# Altium PCB nrf52840_bma250e.PcbDoc
Units mil, origin at the board's own origin, x right, y up, seen from the top; angles counter-clockwise.
Board outline 748.03 x 984.25 mil, 2 copper layers (Top Layer, Bottom Layer), stack 12.8 mil thick; 26 components, 60 nets, 136 pads, 54 vias.
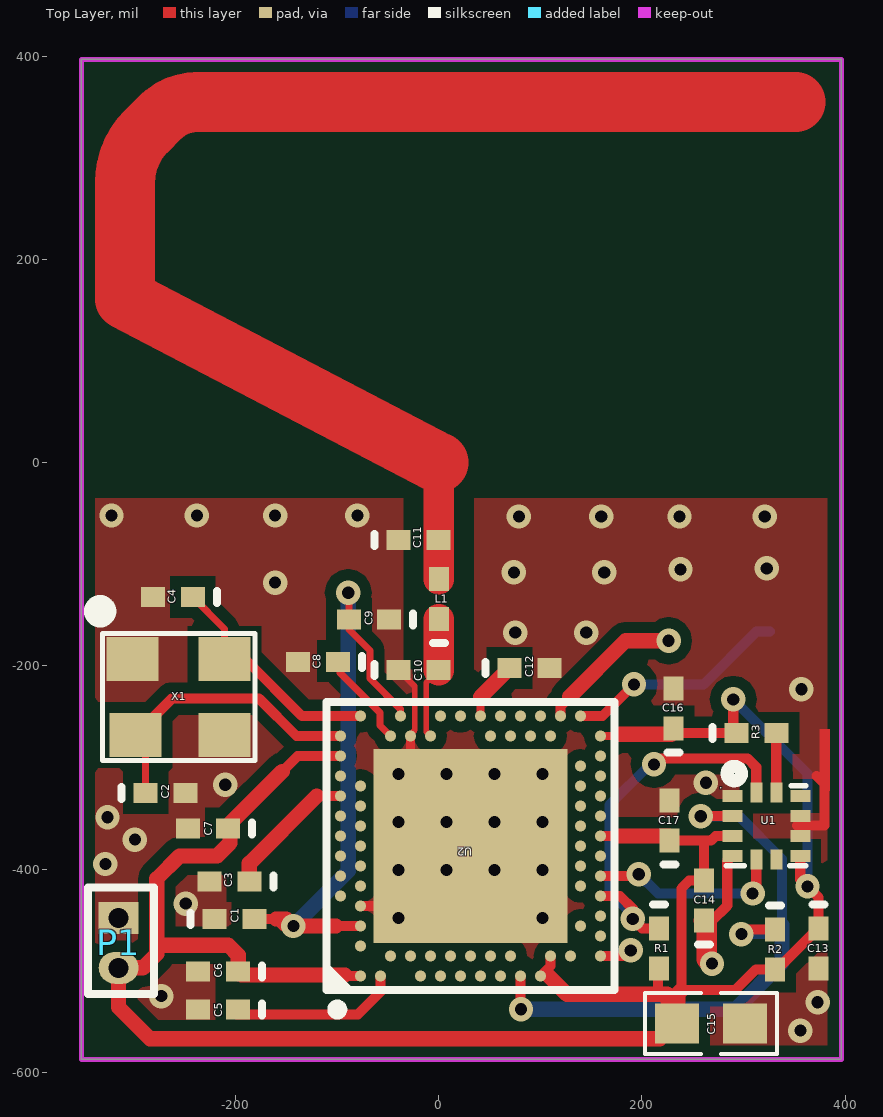
[diagram p0: Top Layer view]
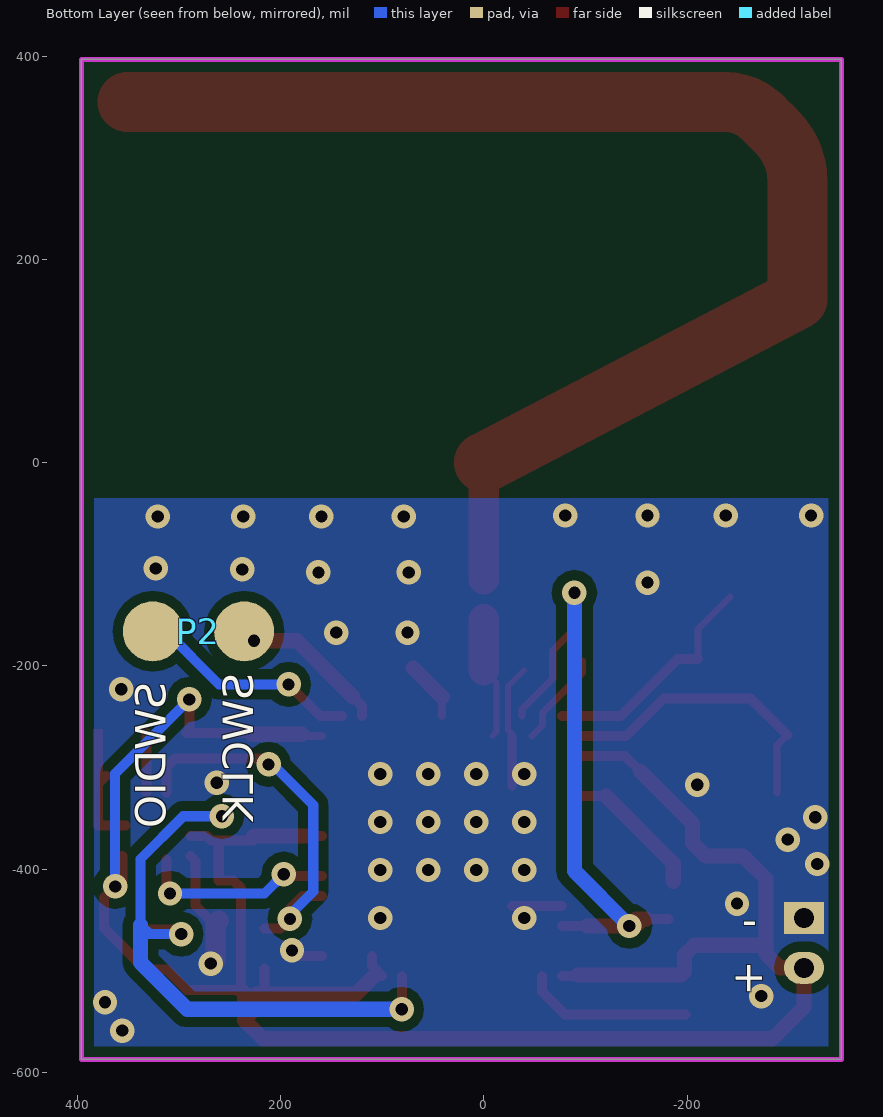
[diagram p1: Bottom Layer view, seen from below]

## Layer stack, top to bottom
Top Solder: solder mask 0.4, Solder Resist, Dk 3.5
Top Layer: signal copper 1.4
Dielectric 1: core 10, FR-4, Dk 4.2
Bottom Layer: signal copper 1.4
Bottom Solder: solder mask 0.4, Solder Resist, Dk 3.5

## Board outline
-351.72,-587.24 -351.72,397.02 396.31,397.02 396.31,-587.24

## Design rules (kind name [scope] priority, off if disabled: settings)
Clearance [All] p1: gap=5
ComponentClearance [All] p1 off: gap=10 collisioncheckmode=3 verticalgap=10 showdistances=FALSE
Height [All] p1 off: minheight=0 maxheight=1000 prefheight=500
MinimumSolderMaskSliver [All] p1 off: minsoldermaskwidth=10
NetAntennae [All] p1 off: netantennaetolerance=0
PlaneConnect [All] p1: planeconnectstyle=Direct reliefexpansion=20 reliefentries=4 reliefconductorwidth=10 reliefairgap=10
PolygonConnect [All] p1: connectstyle=Direct reliefconductorwidth=10 reliefentries=4 polygonreliefangle="90 Angle" airgapwidth=10
RoutingVias [All] p1: holewidth=28 width=50 viastyle="Through Hole" minholewidth=28 minwidth=50 maxholewidth=28 maxwidth=50
SilkToSilkClearance [All] p1 off: silktosilkclearance=10
SilkToSolderMaskClearance [IsPad] p1 off: minsilkscreentomaskgap=10 clearancetoexposedcopper=TRUE
SolderMaskExpansion [All] p1: expansion=4
Width [All] p1: maxlimit=100 minlimit=1 preferedwidth=10 minimp=50.000000 maximp=50.000000 favimp=50.000000
23 further rules are at their usual default settings.

## Components (designator, comment, footprint, x,y, rotation, side; value= is the part's Value field where it differs from the comment)
C1 "1.0µF" 0402-A -201,-449 r0 top
C2 "12pF" 0402-A -268.69,-325.24 r0 top
C3 "N.C." 0402-A -206,-412 r180 top
C4 "12pF" 0402-A -261.69,-132.24 r180 top
C5 "100nF" 0402-A -217,-538 r180 top
C6 "1.0µF" 0402-A -217,-501 r180 top
C7 "100nF" 0402-A -227,-360 r180 top
C8 "100pF" 0402-A -119,-196 r180 top
C9 "N.C." 0402-A -68.69,-154.24 r180 top
C10 "0.8pF" 0402-A -19.69,-204.24 r0 top
C11 "0.5pF" 0402-A -19.69,-76.24 r0 top
C12 "820pF" 0402-A 89.31,-202.24 r0 top
C13 "0.1uF" 0402-A 374,-478 r270 top
C14 "1uF" 0402-A 261,-431 r90 top
C15 "4.7µF" 0603-1 268,-552 r0 top
C16 "100nF" 0402-a 231,-242 r90 top
C17 "100nF" 0402-a 227,-352 r90 top
L1 "4.7nH" 0402-A 0.31,-134.24 r90 top
P1 "Header 2" HDR1_2_1.25 -315,-448 r270 top
P2 "Header 4" HDR1X4 -1280,-854 r0 top
R1 "10K" 0402-A 217,-478 r270 top
R2 "10K" 0402-A 331,-479 r270 top
R3 "10K" 0402-A 313,-266 r0 top
U1 "bma250e" bma250e 289,-328 r0 top
U2 "nRF52840-QIAA" AQFN50P700X700X85_HS-74N 31.31,-377.24 r90 top
X1 "32MHz" SMD3225 -210.69,-193.24 r180 top

## Footprints (in the part's own frame and the unit in brackets; to place one, negate y for a bottom-side part, rotate by r counter-clockwise, add the part's x,y. Pads: shape width x height; smd on the part's side, far side on the other; paste and mask are expansions set on the pad)
0402-A [mm] "Chip Inductor; Body 1 x 0.5 mm (LxW typ)"
  rect 0.6x0.5 smd: 1(-0.5,0) 2(0.5,0)
  silkscreen extent -1.1,-0.15 -1.1,0.15
0402-a [mm] "Chip Inductor; Body 1 x 0.5 mm (LxW typ)"
  rect 0.6x0.5 smd: 1(-0.5,0) 2(0.5,0)
  silkscreen extent -1.1,-0.15 -1.1,0.15
0603-1 [mm] "贴片带丝印"
  rect 1.1x1 smd: 1(-0.85,0) 2(0.85,0)
  silkscreen extent -1.65,-0.76 1.65,0.76, body extent -1.14,-0.38 1.14,0.38, height 1
AQFN50P700X700X85_HS-74N [mm]
  rect 4.85x4.85 smd mask+0.05: 74(0,0)
  round 0.275 smd paste+0.012 mask+0.05: A8(-1.25,3.25) A10(-0.75,3.25) A12(-0.25,3.25) A14(0.25,3.25) A16(0.75,3.25) A18(1.25,3.25) A20(1.75,3.25) A22(2.25,3.25) A23(2.75,3.25) AA24(3.25,-2.25) AB2(-2.75,-2.5) AC5(-2,-2.75) AC9(-1,-2.75) AC11(-0.5,-2.75) AC13(0,-2.75) AC15(0.5,-2.75) AC17(1,-2.75) AC19(1.5,-2.75) AC21(2,-2.75) AC24(3.25,-2.75) AD2(-2.75,-3.25) AD4(-2.25,-3.25) AD6(-1.75,-3.25) AD8(-1.25,-3.25) AD10(-0.75,-3.25) AD12(-0.25,-3.25) AD14(0.25,-3.25) AD16(0.75,-3.25) AD18(1.25,-3.25) AD20(1.75,-3.25) AD22(2.25,-3.25) AD23(2.75,-3.25) B1(-3.25,2.75) B3(-2.5,2.75) B5(-2,2.75) B7(-1.5,2.75) B9(-1,2.75) B11(-0.5,2.75) B13(0,2.75) B15(0.5,2.75) B17(1,2.75) B19(1.5,2.75) B24(3.25,2.75) C1(-3.25,2.25) D2(-2.75,2) D23(2.75,2) E24(3.25,1.75) F2(-2.75,1.5) F23(2.75,1.5) G1(-3.25,1.25) H2(-2.75,1) H23(2.75,1) J1(-3.25,0.75) J24(3.25,0.75) K2(-2.75,0.5) L1(-3.25,0.25) L24(3.25,0.25) M2(-2.75,0) N1(-3.25,-0.25) N24(3.25,-0.25) P2(-2.75,-0.5) P23(2.75,-0.5) R1(-3.25,-0.75) R24(3.25,-0.75) T2(-2.75,-1) T23(2.75,-1) U1(-3.25,-1.25) U24(3.25,-1.25) V23(2.75,-1.5) W1(-3.25,-1.75) W24(3.25,-1.75) Y2(-2.75,-2) Y23(2.75,-2)
  silkscreen extent -4.21,-3.6 3.6,3.6, body extent -3.55,-3.55 3.55,3.55, height 0.85
bma250e [mm]
  rect 0.5x0.3 smd: 1(0,0) 2(0,-0.5) 3(0,-1) 4(0,-1.5) 7(1.7,-1.5) 8(1.7,-1) 9(1.7,-0.5) 10(1.7,0)
  rect 0.3x0.5 smd: 5(0.6,-1.59) 6(1.1,-1.59) 11(1.1,0.09) 12(0.6,0.09)
  silkscreen extent -0.15,-1.75 1.85,0.25
HDR1_2_1.25 [mm]
  rect 0.8x1 hole 0.5: 1(0,0)
  oval 0.8x1 hole 0.5: 2(1.25,0)
  silkscreen extent -0.76,-0.76 1.91,0.89
HDR1X4 [mil] "Connector; Header; 4 Position"
  round 59.06 smd far side: 2(1606,688) 3(1516,688)
  silkscreen extent -50,-50 350,50
SMD3225 [mm]
  rect 1.3x1.1 smd: 1(0,0) 2(2.3,0) 3(2.23,1.9) 4(0,1.9)
  silkscreen extent -0.76,-1.32 3.24,2.54

## Part data
C1 C6: library part C0603-1μ0, "Capacitor, X7R, ±10%"
C2 C4: library part C0402-12p, "Capacitor, NP0, ±2%"
C3 C9: library part C0402-N.C., "Not mounted"
C5 C7 C16 C17: library part C0402-100n, "Capacitor, X7R, ±10%"
C8: library part C0402-100p, "Capacitor, NP0, ±5%"
C10: library part C0402-0.8p, "Capacitor, NP0, ±10%"
C11 C13 C14: library part C0402-0.5p, "Capacitor, NP0, ±10%"
C12: library part C0402-820p, "Capacitor, NP0, ±5%"
C15: library part C0603-4μ7-6.3V-X7R, "Capacitor, X7R, ±10%"
L1: library part L0402-4n7, "High frequency chip inductor ±5%"
P1: "Header, 2-Pin"
P2: "Header, 4-Pin"
R1 R2 R3: library part Res1, "Resistor"
U2: library part nRF52840-QIAAD0, "Multi-protocol Bluetooth Low Energy, IEEE 802.15.4, ANT and 2.4GHz proprietary system-on-chip"
X1: library part XTAL_SMD2016_32MHz_8pF_General, "XTAL SMD 2016, 32MHz, Cl=8pF, Total Tol: ±40ppm"

## Via types
v1: diameter 24, hole 12, Top Layer to Bottom Layer, 54 vias

## Nets (pads, with @x,y where several pads share a name; then routed paths per layer and width w, separated by ;. In a path a pad name is that pad's centre, name@x,y a point inside that pad or via, vN(x,y) a via of type N, cw(c..) or ccw(c..) an arc to the next point about the centre after c; other vN are vias at no path point)
DEC1: C5.1 U2.C1 | length 165.9
  Top Layer w10: C5.1@-198.31,-543 -79.45,-543 -57.27,-520.82 U2.C1
DEC3: C8.1 U2.D23 | length 94.3
  Top Layer w7: C8.1@-97,-195.24 -97,-206.73 -57.69,-246.05 -57.69,-258.71 U2.D23
DEC4_6: C1.2 C9.2 U2.B5 U2.E24 | length 620.1
  Top Layer w7: v1(-89,-128) -88.37,-128.63 C9.2 -88.37,-164.24 -67.69,-184.92 -67.69,-212.53 -37.58,-242.63 U2.E24
  Top Layer w10: C1.2 -160,-449 -153.02,-455.98 v1(-143,-455.98) ; -101,-455.98 U2.B5
  Top Layer w15: -160,-449 -149.98,-449 v1(-143,-455.98) -101,-455.98
  Bottom Layer w15: v1(-143,-455.98) -89,-401.98 v1(-89,-128)
GND: C1.1 C2.2 C3.2 C4.2 C5.2 C6.2 C7.2 C8.2 C9.1 C10.1 C11.1 C12.2 C13.2 C14.1 C15.2 C16.2 C17.2 P1.1 U1.1 U1.4 U1.8 U1.9 U2.74 U2.AD2 U2.B7 U2.F23 X1.2 X1.4 | length 408.5
  Top Layer w5.71: C10.1 -23.61,-220 -23.61,-263.24 -27.74,-267.37 U2.F23
  Top Layer w9: U2.74@-27.74,-318.18 U2.F23
  Top Layer w10: U2.B7 U2.74@-27.74,-436.29 ; U2.AD2 183.5,-485.5 v1(189,-480) ; C14.1 269.32,-450.68 284,-436 284,-392.06 U1.4 ; 353,-357 379.81,-357 379.81,-316.14 372,-308.32
  Top Layer w20: C14.1 264,-453.68 264,-489 268,-493 v1(269,-493)
  other v1: 356,-559 373,-531 -273,-525 -39.55,-448.1 102.18,-448.1 -249,-434 -39.55,-400.86 7.69,-400.86 54.94,-400.86 102.18,-400.86 -328,-395 -299,-371 -39.55,-353.61 7.69,-353.61 54.94,-353.61 102.18,-353.61 -326,-349 -210,-317 263,-315 -39.55,-306.37 7.69,-306.37 54.94,-306.37 102.18,-306.37 357,-223 75.31,-167.24 145.31,-167.24 -161,-118 74,-108 163,-108 238,-105 323,-104 79,-53 160,-53 237,-53 321,-53 -322,-52 -238,-52 -161,-52 -80,-52
NetC3_1: C3.1 U2.A18 | length 134.8
  Top Layer w10: -120.02,-328.02 U2.A18
  Top Layer w15: C3.1 -186.31,-394.31 -120.02,-328.02
NetC10_2: C10.2 L1.1 U2.H23 | length 121.5
  Top Layer w5.71: U2.H23 -12.19,-264.83 -12.19,-216.43 C10.2
  Top Layer w30: C10.2 L1.1@0,-154.24
NetC12_1: C12.1 U2.N24 | length 58.8
  Top Layer w8: U2.N24 41.16,-230.71
  Top Layer w15: 41.16,-230.71 C12.1
NetR3_2: R3.2 U1.11 | length 58.6
  Top Layer w10: U1.11 332.31,-266.38 R3.2
P0.02/AIN0: U2.A12
P0.03/AIN1: U2.B13
P0.04/AIN2: U2.J1
P0.05/AIN3: U2.K2
P0.06: U2.L1
P0.07: U2.M2
P0.08: U2.N1
P0.09/NFC1: U2.L24
P0.10/NFC2: U2.J24
P0.11: U2.T2
P0.12: R2.1 U1.2 U2.U1 | length 623.1
  Top Layer w10: U2.U1 80.53,-537.53 v1(81,-538) ; v1(258,-348) 258,-347 v1@261,-344 ; v1@258.32,-347.68 U1.2 ; v1(298,-464) 302.69,-459.31 R2.1
  Bottom Layer w10: v1(258,-348) 296,-348 338,-390 338,-455 329,-464 v1(298,-464)
  Bottom Layer w15: v1(81,-538) 292,-538 338,-492 338,-455
P0.13: R1.1 U1.12 U2.AD8 | length 390.8
  Top Layer w10: U2.AD8 178.45,-426.45 191,-439 v1(191,-449) 200.32,-458.31 R1.1@216,-458.31 ; v1@213,-298 v1(212,-297) 218,-291 304,-291 312.62,-299.62 U1.12
  Bottom Layer w10: v1(191,-449) 191,-445 168,-422 168,-337 208,-297 v1(212,-297)
P0.14: U2.AC9
P0.15: U1.5 U2.AD10 | length 193.2
  Top Layer w10: U2.AD10 195.24,-406.76 v1(197,-405) ; v1(309,-424) 312.62,-420.38 U1.5
  Bottom Layer w10: v1(197,-405) 216,-424 v1(309,-424)
P0.16: U2.AC11
P0.17: U2.AD12
P0.18/RESET: U2.AC13
P0.19: U2.AC15
P0.20: U2.AD16
P0.21: U2.AC17
P0.22: U2.AD18
P0.23: U2.AC19
P0.24: U2.AD20
P0.25: U2.AC21
P0.26: U2.G1
P0.27: U2.H2
P0.28/AIN4: U2.B11
P0.29/AIN5: U2.A10
P0.30/AIN6: U2.B9
P0.31/AIN7: U2.A8
P1.00: U2.AD22
P1.01: U2.Y23
P1.02: U2.W24
P1.03: U2.V23
P1.04: U2.U24
P1.05: U2.T23
P1.06: U2.R24
P1.07: U2.P23
P1.08: U2.P2
P1.09: U2.R1
P1.10: U2.A20
P1.11: U2.B19
P1.12: U2.B17
P1.13: U2.A16
P1.14: U2.B15
P1.15: U2.A14
RF: C11.2 L1.2 | length 1282.3
  Top Layer w30: 0,0 C11.2 0.31,-76.55 L1.2
  Top Layer w59.06: 0,0 -308.75,160.94 -308.75,275.91 cw(c-237.91,275.91) -288,326 -274,340 cw(c-237.79,303.79) -237.79,355 351,355
SWDCLK: P2.3 U2.AA24 | length 142.8
  Top Layer w10: U2.AA24 119.9,-239.65 129,-230.55
  Top Layer w15: 128.87,-230.42 184.05,-175.24 v1(226.31,-175.24)
SWDIO: P2.2 U2.AC24 | length 220.9
  Top Layer w10: U2.AC24 161.27,-249.28 v1(192.31,-218.24)
  Bottom Layer w10: v1(192.31,-218.24) 260.76,-218.24 313,-166 P2.2
VDD_NRF: C6.1 C7.1 C13.1 C14.2 C15.1 C16.1 C17.1 P1.2 R1.2 R2.2 R3.1 U1.3 U1.7 U2.A22 U2.AD14 U2.AD23 U2.B1 U2.W1 U2.Y2 | length 2351.6
  Top Layer w8: U2.AD23 179.05,-268.97
  Top Layer w10: -154,-304 -138.65,-288.65 U2.A22 ; -92.22,-504.24 -91.27,-505.19 U2.B1 ; U2.W1 110.06,-495.35 U2.Y2 ; U2.AD14 175.31,-367.39 ; 216,-522.24 R1.2@216,-497.69 ; C17.1 227.32,-372 C17.1@233.32,-372 ; C17.1@228,-366.68 C17.1@233.32,-372 ; C16.1@228.85,-267.24 230.09,-266 R3.1 290,-262.68 v1(290,-233) ; U1.3 272.57,-367.37 267.94,-372 260,-372 ; U1.7 355.93,-409.93 v1(363,-417) 374,-428 C13.1 373.69,-458.31 333.31,-498.69 R2.2 312.31,-498.69 292,-519 239,-519 239,-419 246.69,-411.31 C14.2 261,-373 260,-372 ; C17.1@233.32,-372 260,-372
  Top Layer w13: 225,-522 225,-538.46 C15.1@235.54,-549
  Top Layer w15: -154,-304 -205.31,-355.31 -205.31,-374.31 -218,-387 -255,-387 -277.5,-409.5 -277.5,-475 ; -92.22,-504.24 -194.08,-504.24 C6.1 -197.31,-484.68 -207,-475 -277.5,-475 ; 108.31,-505.24 126.31,-523.24 223.76,-523.24 ; 175.31,-367.39 C17.1@226.84,-367.39 ; 179.05,-267.24 C16.1@228.85,-267.24 ; 239,-519 235.54,-522.46 235.54,-549 217.54,-567 -284,-567 -315,-536 P1.2 -291.21,-497.21 -277.5,-483.5 -277.5,-475
  Bottom Layer w10: v1(290,-233) 363,-306 v1(363,-417)
XC1: C4.1 U2.B24 X1.1 | length 230.9
  Top Layer w7: C4.1 -210.69,-163.55 X1.1
  Top Layer w10: X1.1 -190.69,-193.24 -134.64,-249.28 U2.B24
XC2: C2.1 U2.A23 X1.3 | length 293.3
  Top Layer w7: X1.3 -288.37,-278.15 C2.1
  Top Layer w10: X1.3 -262.68,-232.24 -176.69,-232.24 -139.95,-268.97 U2.A23
pads on no net: U1.6 U1.10 U2.AB2 U2.AC5 U2.AD4 U2.AD6 U2.B3 U2.D2 U2.F2

## Polygon pours and split planes (outlines as drawn)
GND on Top Layer "Top Solder-No Net" (solid, remove dead copper, pour order 28): -352,-35 -35,-35 -35,-199.87 -39.37,-204.24 -39.13,-204 35,-204 35,-35 396.31,-35 396.31,-587.24 -351.72,-587.24
GND on Bottom Layer "Top Solder-No Net" (solid, remove dead copper, pour order 30): -351.72,-35 396.31,-35 396.31,-587.24 -351.72,-587.24

## Keep-outs
Keep-Out Layer:
  the board outline again, w5

## Other copper
Top Layer:
  rectangle net GND: 375,-323 385,-262

## Silkscreen, mask and mechanical layers (free items; w line width, h text height)
Top Overlay:
  circle w13: c291,-306 r7.07
Bottom Overlay:
  text "SWCLK" at 227,-207 h30 r270
  text "SWDIO" at 313,-216 h30 r270
  text "-" at -269,-465 h30
  text "+" at -274,-490 h30 r270
Top Solder:
  rectangle: -351.72,-33 396.31,397.02
Bottom Solder:
  rectangle: -351.72,-33 396.31,397.02